# Altium PCB PCB1.PcbDoc
Units mm, origin at the board's own origin, x right, y up, seen from the top; angles counter-clockwise.
Board outline 43 x 33 mm, 2 copper layers (Top Layer, Bottom Layer); 23 components, 20 nets, 68 pads, 0 vias.
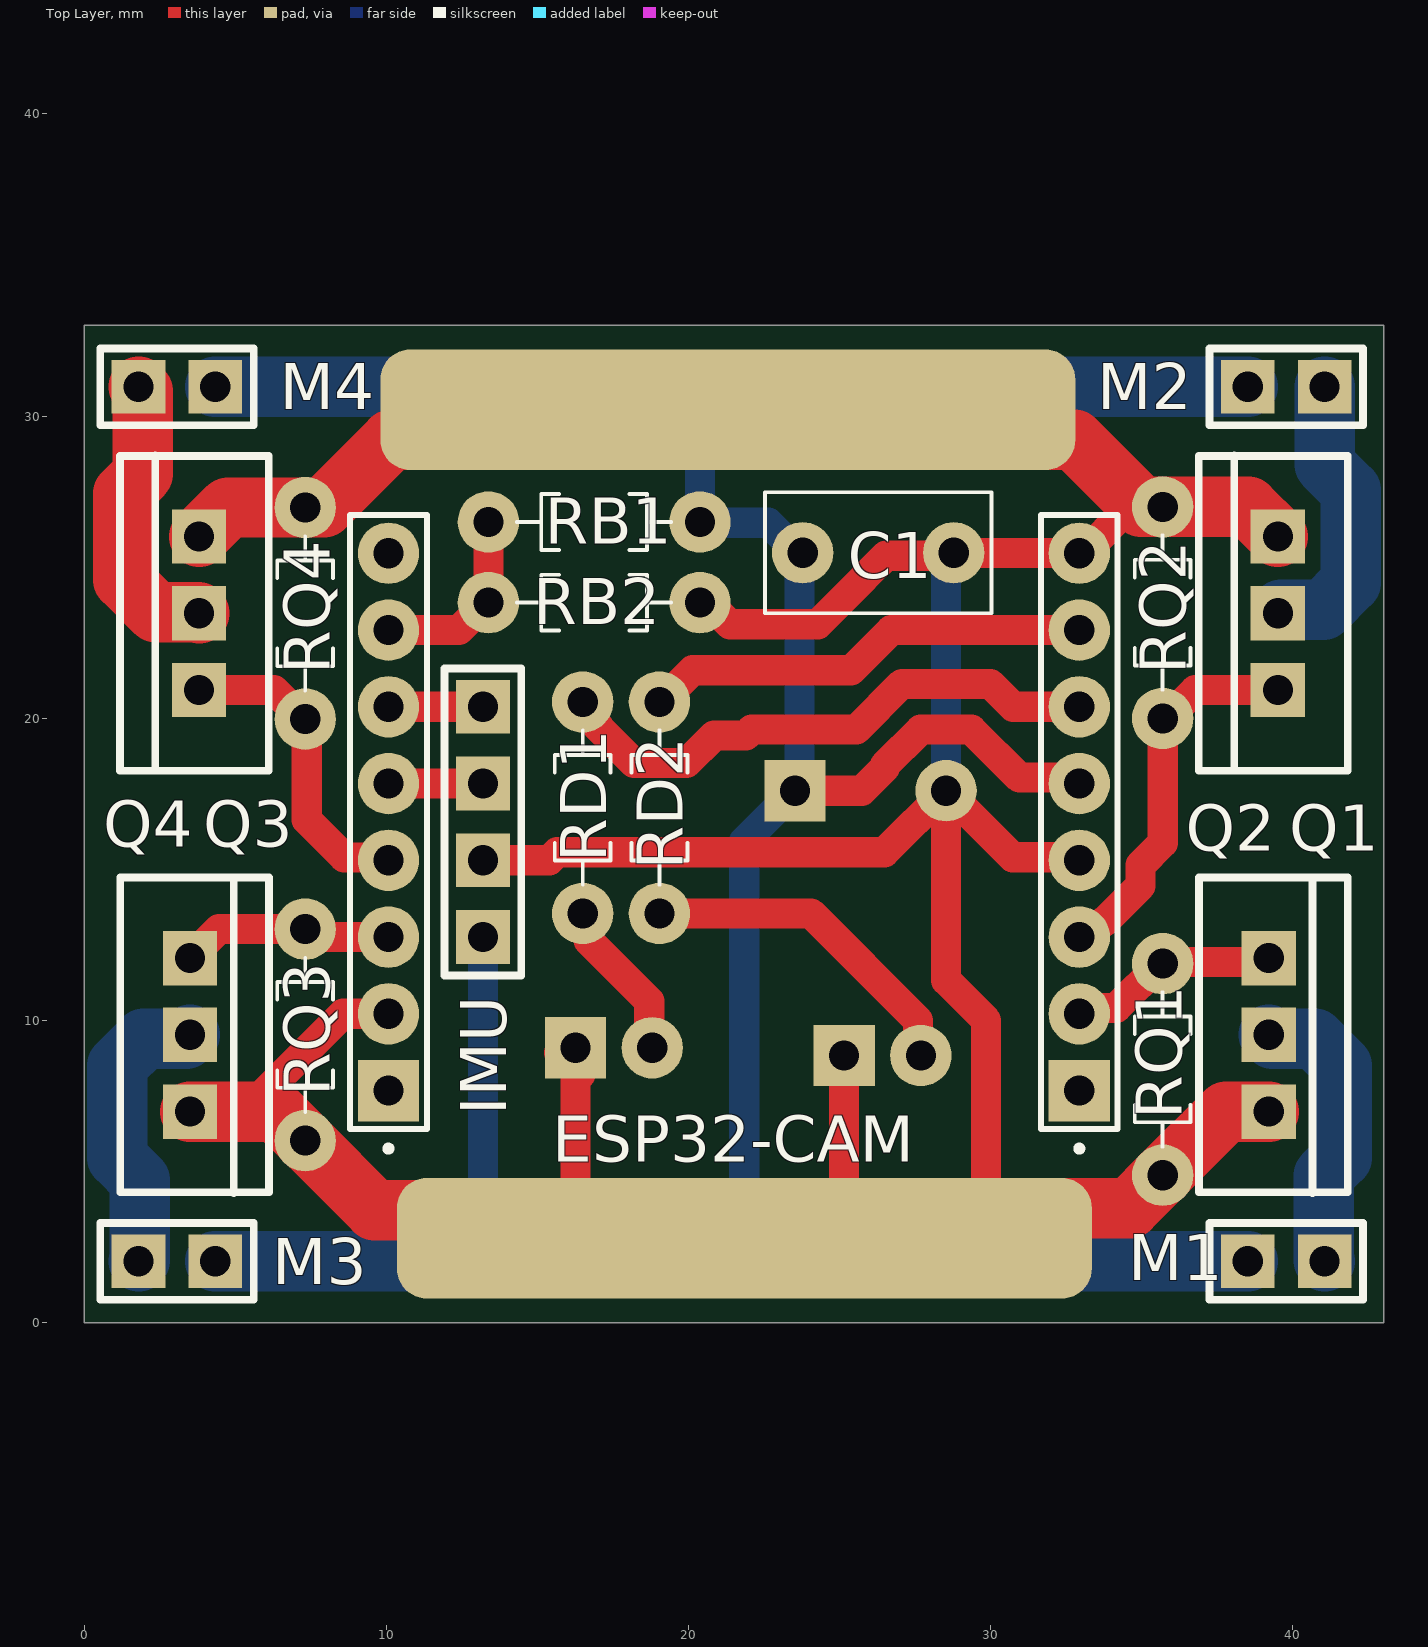
[diagram p0: Top Layer view]
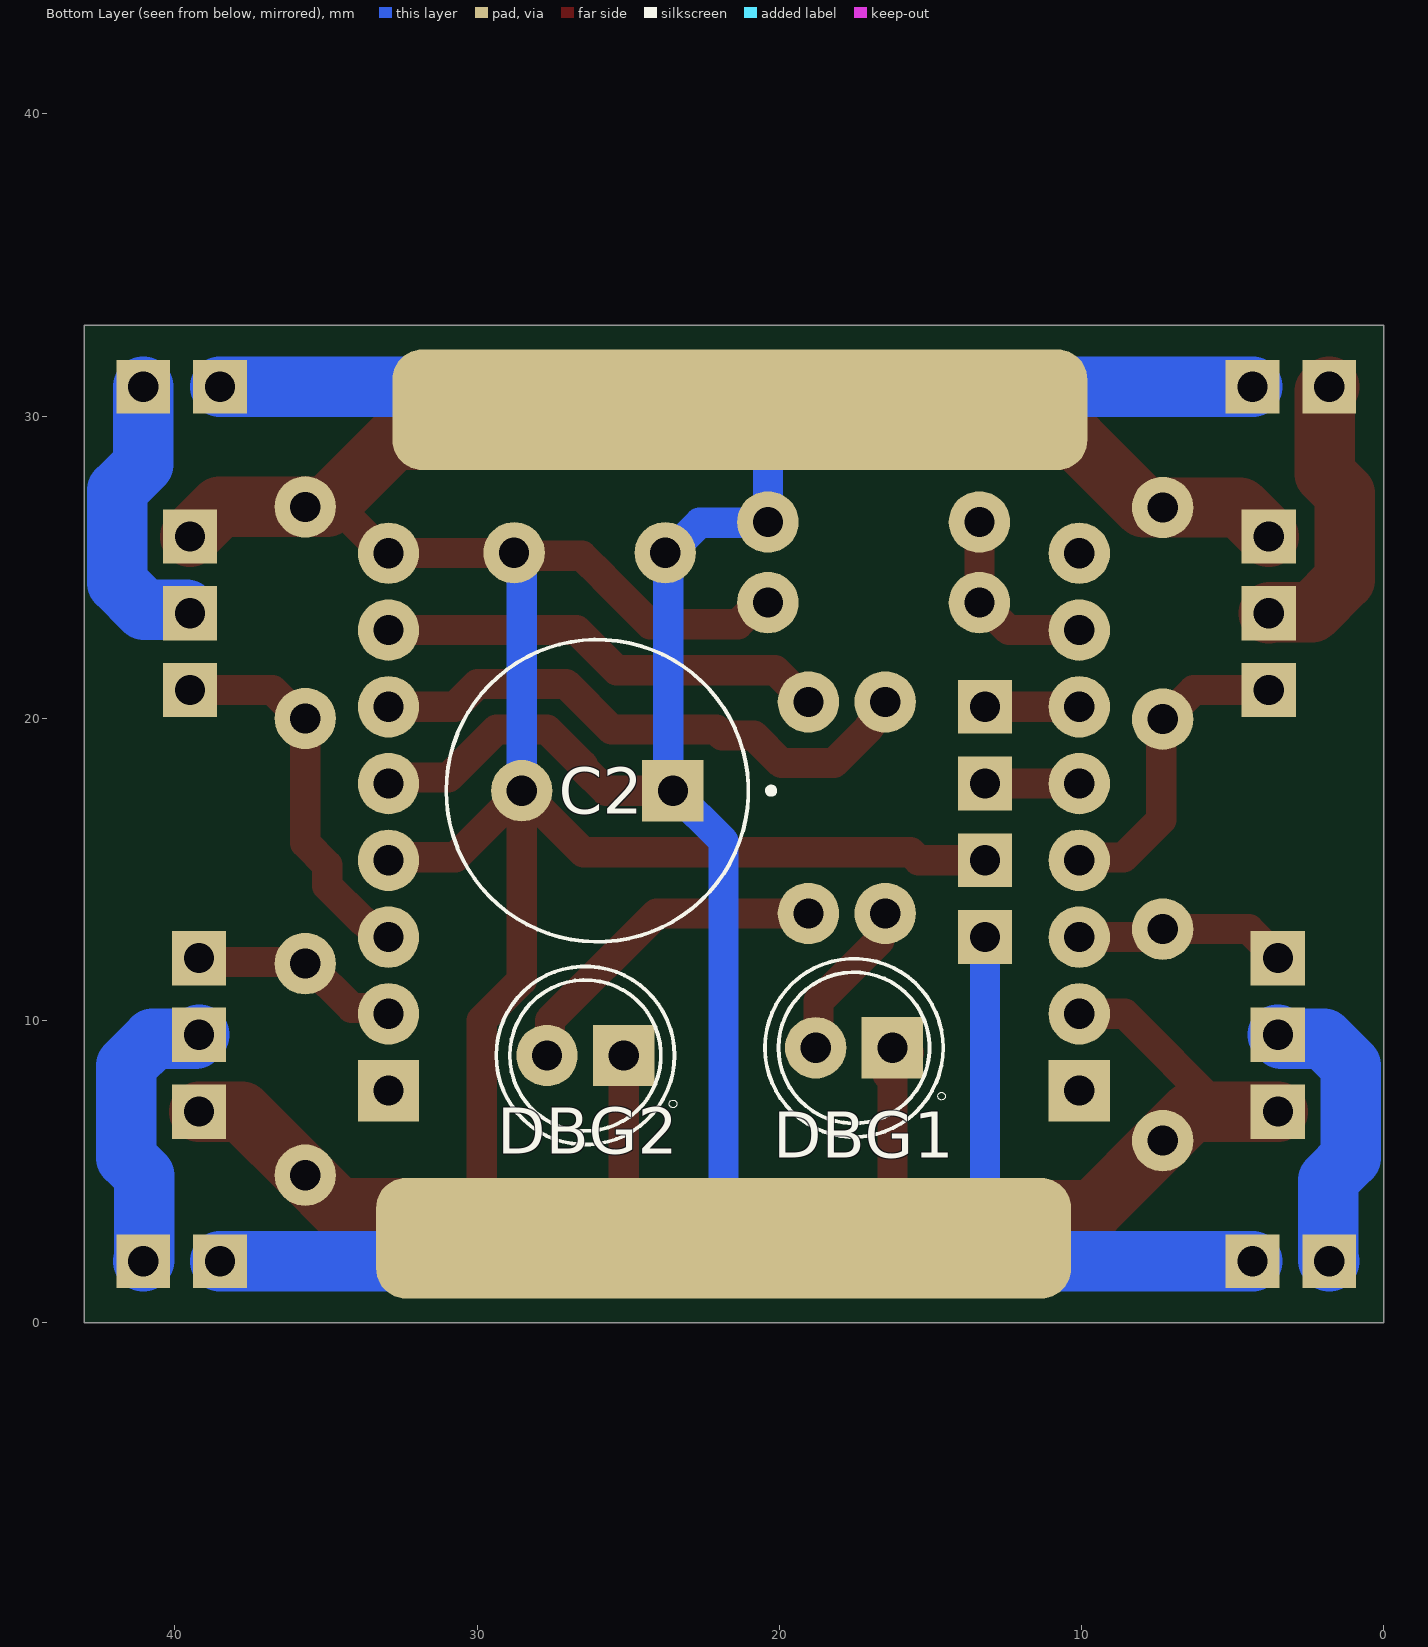
[diagram p1: Bottom Layer view, seen from below]

## Layer stack, top to bottom
Top Solder: solder mask 0.0102, Solder Resist, Dk 3.5
Top Layer: signal copper 0.0356
Dielectric 1: dielectric 0.32, FR-4, Dk 4.8
Bottom Layer: signal copper 0.0356
Bottom Solder: solder mask 0.0102, Solder Resist, Dk 3.5

## Board outline
0,0 43,0 43,33 0,33

## Design rules (kind name [scope] priority, off if disabled: settings)
Clearance [All] p1: gap=0.508 ignorepadtopadclearanceinfootprint=FALSE
PlaneConnect [All] p1: planeconnectstyle=Direct reliefexpansion=0.508 reliefentries=4 reliefconductorwidth=0.254 reliefairgap=0.254
PolygonConnect [All] p1: connectstyle=Direct reliefconductorwidth=0.254 reliefentries=4 polygonreliefangle="90 Angle" airgapwidth=0.254
RoutingVias [All] p1: holewidth=0.711 width=1.27 viastyle="Through Hole" minholewidth=0.711 minwidth=1.27 maxholewidth=0.711 maxwidth=1.27
SolderMaskExpansion [All] p1: expansion=0.102 istentingtop=FALSE
SupplyNets "Schematic Supply Nets" [InNet('GND')] p1: voltage=0.000
Width [All] p1: maxlimit=6 minlimit=1 preferedwidth=2 minimp=50.000000 maximp=50.000000 favimp=50.000000
29 further rules are at their usual default settings.

## Classes and differential pairs
component class Esquematico: ESP32-CAM J

## Components (designator, comment, footprint, x,y, rotation, side; value= is the part's Value field where it differs from the comment)
C1 "100uF" CAP_RDER73A104K5E1H03A 26.274,25.479 r0 top
C2 "100nF" CAPPRD500W60D1000H2000 26.02,17.605 r0 bottom
DBG1 "WP7113ID" LED_WP7113ID 17.526,9.096 r0 bottom
DBG2 "WP7113ID" LED_WP7113ID 26.416,8.842 r0 bottom
ESP32-CAM "SS-108-T-2" SAMTEC_SS-108-T-2 10.07,7.68 r270 top
IMU "CONECTOR_4PIN" CON4 13.193,12.76 r90 top
M1 "CONECTOR_2PIN" CON2 41.046,2.032 r180 top
M2 "CONECTOR_2PIN" CON2 41.046,30.968 r180 top
M3 "CONECTOR_2PIN" CON2 1.8,2.032 r0 top
M4 "CONECTOR_2PIN" CON2 1.8,30.968 r0 top
Q1 "MOSFET-N" TO220 39.2,12.065 r270 top
Q2 "MOSFET-N" TO220 39.5,20.935 r90 top
Q3 "MOSFET-N" TO220 3.5,12.065 r270 top
Q4 "MOSFET-N" TO220 3.8,20.935 r90 top
RB1 "920k" RESAD700W45L350D185 16.876,26.495 r180 top
RB2 "3.3M" RESAD700W45L350D185 16.876,23.828 r0 top
RD1 "110 Ohms" RESAD700W45L350D185 16.495,17.041 r90 top
RD2 "110 Ohms" RESAD700W45L350D185 19.035,17.041 r90 top
RQ1 "10K" RESAD700W45L350D185 35.687,8.382 r90 top
RQ2 "10K" RESAD700W45L350D185 35.687,23.495 r270 top
RQ3 "10K" RESAD700W45L350D185 7.313,9.525 r90 top
RQ4 "10K" RESAD700W45L350D185 7.313,23.475 r270 top
? "SS-108-T-2" SAMTEC_SS-108-T-2 32.93,7.68 r270 top

## Footprints (in the part's own frame and the unit in brackets; to place one, negate y for a bottom-side part, rotate by r counter-clockwise, add the part's x,y. Pads: shape width x height; smd on the part's side, far side on the other; paste and mask are expansions set on the pad)
CAP_RDER73A104K5E1H03A [mm]
  round 2.032 hole 1: 1(-2.5,0) 2(2.5,0)
  silkscreen extent -3.75,-2 3.75,2
CAPPRD500W60D1000H2000 [mm]
  round 2.032 hole 1: N(2.5,0)
  rect 2.032x2.032 hole 1: P(-2.5,0)
  silkscreen extent -5.85,-5 5,5, body extent -4.98,-5 5,5, height 20
CON2 [mil]
  rect 70x70 hole 39.37: 1(0,0) 2(100,0)
  silkscreen extent -50,-50 150,50, body extent -42,-47 143,45, height 519
CON4 [mil]
  rect 70x70 hole 39.37: 1(0,0) 2(100,0) 3(200,0) 4(300,0)
  silkscreen extent -50,-50 350,50, body extent -50,-47 343,45, height 519
LED_WP7113ID [mil]
  round 80 hole 39.37: A(50,0)
  rect 80x80 hole 39.37: C(-50,0)
  silkscreen extent -119,-116 116,116, body extent -98,-116 116,116, height 378
RESAD700W45L350D185 [mm]
  round 2.032 hole 1: 1(-3.5,0) 2(3.5,0)
  silkscreen extent -2.55,-0.92 2.55,0.92, body extent -3.72,-0.92 3.72,0.92, height 1.84
SAMTEC_SS-108-T-2 [mil]
  rect 80x80 hole 39.37: 01(0,0)
  round 80 hole 39.37: 02(-100,0) 03(-200,0) 04(-300,0) 05(-400,0) 06(-500,0) 07(-600,0) 08(-700,0)
  silkscreen extent -750,-50 80,50
TO220 [mm]
  rect 1.8x1.8 hole 1: 1(0,0) 2(2.54,0) 3(5.08,0)
  silkscreen extent -2.67,-2.31 7.77,2.62, body extent -2.41,-2.12 7.49,2.38, height 20.66

## Part data
C1: library part RDER73A104K5E1H03A, "Lead Capacitor X7R_EIA_ with Capacitance: 0.10F and Rated Voltage: 1000Vdc", Package="Radial Murata", Availability=Unavailable, MF=Murata, MP=RDER73A104K5E1H03A, Price=None, SnapEDA_Link=https://www.snapeda.com/parts/RDER73A104K5E1H03A/Murata/view-part/4545952/?ref=snap
C2: library part EEUFC2A470, "47F 100V Aluminum Electrolytic Capacitors Radial, Can", Package="RADIAL-2 Panasonic", Availability="In Stock", Check_prices=https://www.snapeda.com/parts/EEU-FC2A470/Panasonic%20Electronic%20Components/view-part/564661/?ref=eda, MF="Panasonic Electronic", MP=EEU-FC2A470, Price=None, SnapEDA_Link=https://www.snapeda.com/parts/EEU-FC2A470/Panasonic%20Electronic%20Components/view-part/564661/?ref=snap
DBG1 DBG2: "Red 617nm LED Indication - Discrete 2V Radial", Package="Radial Kingbright", Availability="In Stock", Check_prices=https://www.snapeda.com/parts/WP7113ID/Kingbright/view-part/?ref=eda, MF=Kingbright, MP=WP7113ID, Price=None, Purchase-URL=https://pricing.snapeda.com/search/part/WP7113ID/?ref=eda, SnapEDA_Link=https://www.snapeda.com/parts/WP7113ID/Kingbright/view-part/?ref=snap
ESP32-CAM ?: "SS Series .100 Single Row Screw Machine Socket Strip", Package=None, Availability=Bad, Check_prices=https://www.snapeda.com/parts/SS-108-T-2/Samtec/view-part/3323909/?ref=eda, MF=Samtec, MP=SS-108-T-2, Price=None, SnapEDA_Link=https://www.snapeda.com/parts/SS-108-T-2/Samtec/view-part/3323909/?ref=snap
Q1 Q2 Q3 Q4: "N-Channel MOSFET"
RB1 RB2 RD1 RD2 RQ1 RQ2 RQ3 RQ4: library part 3-1623927-1, "1 MOhms Â±5% 0.25W, 1/4W Through Hole Resistor Axial - Carbon Film", Package=None, Check_prices=https://www.snapeda.com/parts/3-1623927-1/TE+Connectivity/view-part/?ref=eda, MF="TE Connectivity", MP=3-1623927-1, SnapEDA_Link=https://www.snapeda.com/parts/3-1623927-1/TE+Connectivity/view-part/?ref=snap

## Free pads (board coordinates)
  rrect50% 23x4 smd: 25(21.3,30.211) 25(21.844,2.794)
  rrect50% 23x4 smd far side: 25(21.3,30.211) 25(21.844,2.794)

## Nets (pads, with @x,y where several pads share a name; then routed paths per layer and width w, separated by ;. In a path a pad name is that pad's centre, name@x,y a point inside that pad or via, vN(x,y) a via of type N, cw(c..) or ccw(c..) an arc to the next point about the centre after c; other vN are vias at no path point)
3.3V: ?.01
5V: ESP32-CAM.01
GND: ?.04 ?.08 C1.2 C2.N DBG1.C DBG2.C ESP32-CAM.02 IMU.2 pad.25@21.3,30.211 pad.25@21.844,2.794 Q1.3 Q2.3 Q3.3 Q4.3 RB2.2 RQ1.1 RQ2.1 RQ3.1 RQ4.1 | length 167.7
  Top Layer w1: 5.334,6.985 8.569,10.22 ESP32-CAM.02 ; IMU.2 15.392,15.3 15.657,15.565 26.48,15.565 C2.N ; DBG1.C@15.708,8.93 15.899,8.739 DBG1.C@16.421,8.217 ; DBG1.C@16.149,8.834 16.518,8.834 DBG1.C@16.518,8.512 ; pad.25@16.256,4.256 16.256,8.382 DBG1.C ; pad.25@19.184,4.256 20.646,2.794 25.146,2.794 27.994,2.794 pad.25@29.456,4.256 ; RB2.2 20.655,23.828 21.369,23.114 24.271,23.114 25.798,24.641 25.798,24.645 26.532,25.379 28.674,25.379 C1.2 28.783,25.469 32.92,25.469 ?.08 33.072,25.46 34.507,26.895 35.587,26.895 RQ2.1 ; pad.25@25.146,4.256 25.146,5.721 DBG2.C ; pad.25@29.845,4.124 29.845,10.003 28.52,11.328 C2.N ; ?.04 32.83,15.4 30.725,15.4 C2.N
  Top Layer w2: Q3.3 5.334,6.985 6.353,6.985 RQ3.1 9.616,3.722 pad.25@16.256,3.722 ; Q4.3 4.76,26.975 RQ4.1 7.925,26.975 10.161,29.211 29.8,29.211 pad.25@30.8,30.211 ; pad.25@21.3,30.211 29.8,30.211 30.8,29.211 32.765,29.211 34.981,26.995 RQ2.1 38.52,26.995 Q2.3 ; pad.25@25.146,3.794 27.994,3.794 29.456,3.794 34.599,3.794 RQ1.1 37.79,6.985 Q1.3
  Bottom Layer w1: C2.N 28.52,25.083 28.774,25.337 C1.2
GPIO01(DBG2): ?.07 RD2.2 | length 14.9
  Top Layer w1: RD2.2 19.088,20.541 20.137,21.59 25.377,21.59 26.707,22.92 ?.07
GPIO02(VBAT): ESP32-CAM.07 RB1.2 RB2.1 | length 6.3
  Top Layer w1: ESP32-CAM.07 12.398,22.92 13.306,23.828 RB2.1 RB1.2
GPIO03(DBG1): ?.06 RD1.2 | length 18.9
  Top Layer w1: RD1.2 16.495,20.262 17.011,19.746 17.011,19.703 18.197,18.517 19.927,18.517 20.841,19.431 21.888,19.431 22.086,19.629 25.549,19.629 27.057,21.137 29.983,21.137 30.74,20.38 ?.06
GPIO04: ESP32-CAM.08
GPIO10(M2): ?.03 Q2.1 RQ2.2 | length 12.8
  Top Layer w1: ?.03 33.209,12.76 33.725,13.276 33.768,13.276 34.954,14.462 34.954,15.142 35.687,15.875 RQ2.2 35.829,19.995 36.769,20.935 Q2.1
GPIO12(M3): ESP32-CAM.03 Q3.1 RQ3.2 | length 7.1
  Top Layer w1: Q3.1 4.46,13.025 RQ3.2 7.383,13.025 7.648,12.76 ESP32-CAM.03
GPIO13(M4): ESP32-CAM.04 Q4.1 RQ4.2 | length 10.5
  Top Layer w1: Q4.1 6.283,20.935 7.243,19.975 RQ4.2 7.362,19.926 7.362,16.641 8.607,15.396 9.974,15.396 ESP32-CAM.04
GPIO14(SDA): ESP32-CAM.06 IMU.4 | length 3.1
  Top Layer w1: ESP32-CAM.06 IMU.4
GPIO15(SCL): ESP32-CAM.05 IMU.3 | length 3.1
  Top Layer w1: ESP32-CAM.05 IMU.3
GPIO16(M1): ?.02 Q1.1 RQ1.2 | length 7
  Top Layer w1: ?.02 33.127,10.417 34.153,10.417 35.617,11.882 RQ1.2 35.736,11.931 39.066,11.931 Q1.1
NetDBG1_A: DBG1.A RD1.1 | length 5.4
  Top Layer w1: RD1.1 16.692,13.344 16.692,12.645 18.699,10.638 18.699,9.193 DBG1.A
NetDBG2_A: DBG2.A RD2.1 | length 11.2
  Top Layer w1: RD2.1 24.051,13.541 27.589,10.003 27.589,8.939 DBG2.A
NetM1_1: M1.1 Q1.2 | length 9.6
  Bottom Layer w2: Q1.2 39.332,9.393 40.725,9.393 41.608,8.51 41.608,5.46 41.014,4.867 41.014,2.064 M1.1
NetM2_1: M2.1 Q2.2 | length 9.5
  Bottom Layer w2: Q2.2@39.615,23.59 41.007,23.59 41.908,24.49 41.908,27.54 41.046,28.401 M2.1
NetM3_1: M3.1 Q3.2 | length 9.6
  Bottom Layer w2: M3.1 1.832,2.064 1.832,4.72 1.092,5.46 1.092,8.51 1.975,9.393 3.368,9.393 Q3.2
NetM4_1: M4.1 Q4.2 | length 9.7
  Top Layer w2: M4.1 1.943,30.825 1.943,28.091 1.292,27.44 1.292,24.59 2.375,23.507 3.768,23.507 Q4.2
VBAT: ?.05 C1.1 C2.P IMU.1 M1.2 M2.2 M3.2 M4.2 pad.25@21.3,30.211 pad.25@21.844,2.794 RB1.1 | length 115.1
  Top Layer w1: C2.P 25.733,17.605 26.496,18.368 26.496,18.443 27.682,19.629 29.358,19.629 30.95,18.037 32.733,18.037 ?.05
  Bottom Layer w1: IMU.1 13.193,4.256 pad.25@14.655,2.794 ; pad.25@21.3,30.211 20.376,29.287 RB1.1 20.398,26.473 22.638,26.473 23.632,25.479 C1.1 23.674,25.379 23.674,17.759 C2.P 21.844,15.929 pad.25@21.844,2.794
  Bottom Layer w2: M3.2 pad.25@14.655,2.032 ; M4.2 20.543,30.968 21.3,30.211 22.057,30.968 M2.2 ; pad.25@21.844,2.794 22.606,2.032 M1.2